# EAGLE board UVBoxSchematic_r (EAGLE 7.5.0)
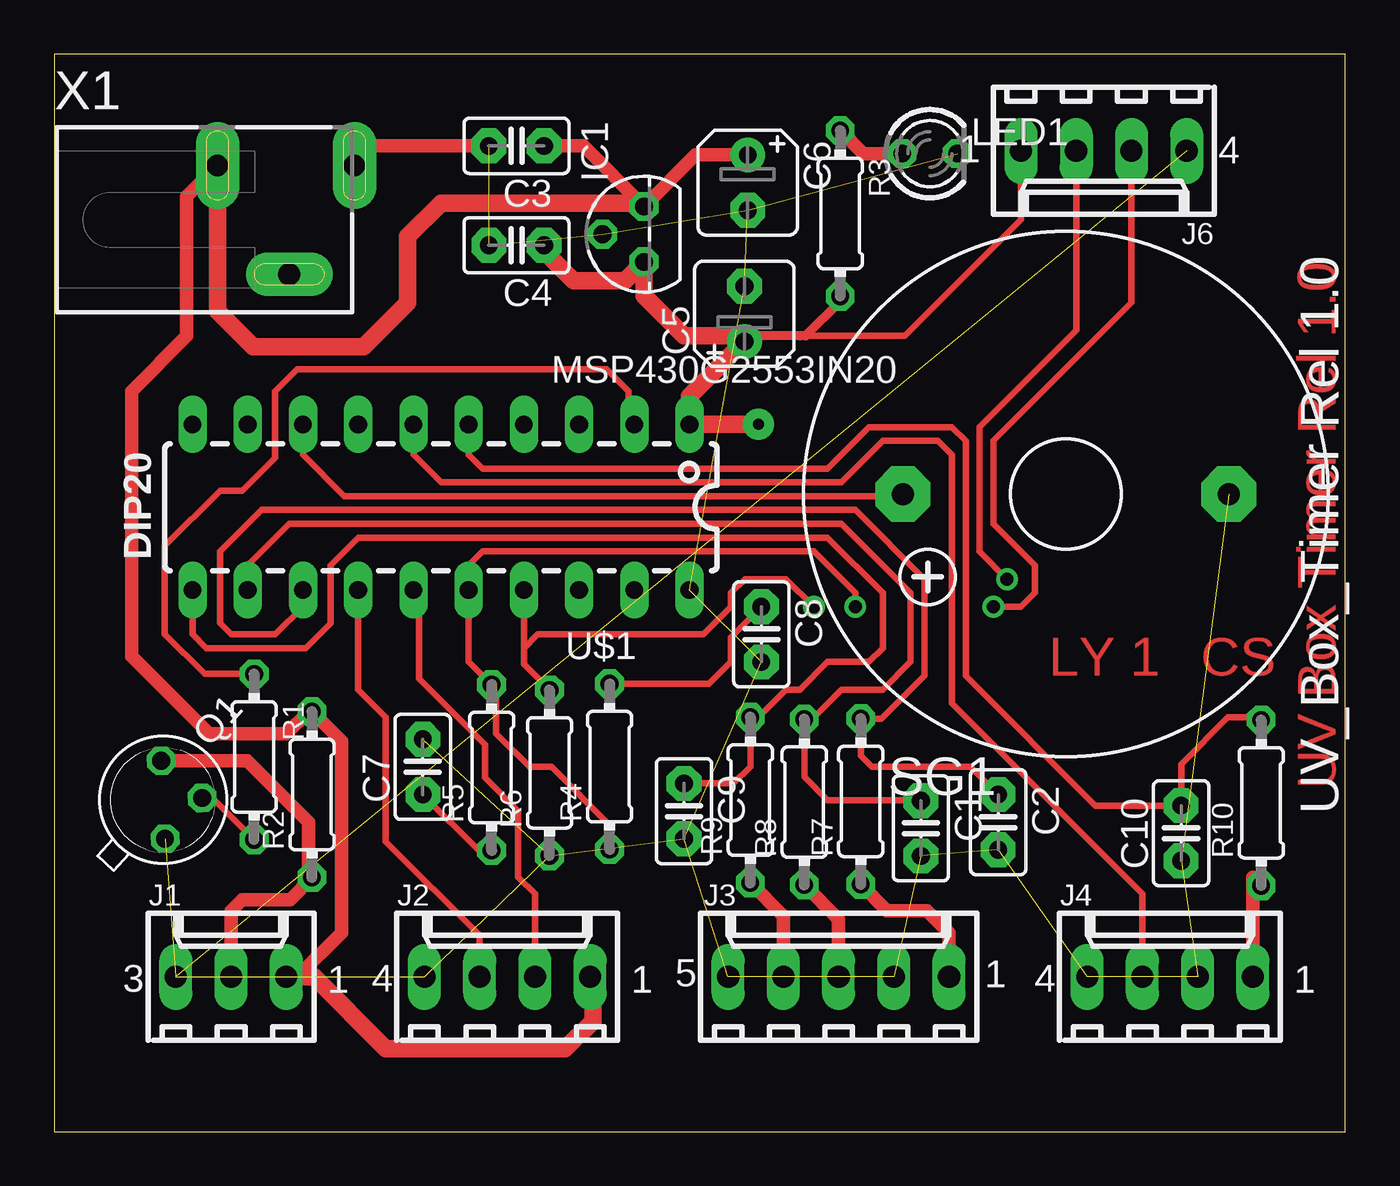
[diagram p0: board, top side]
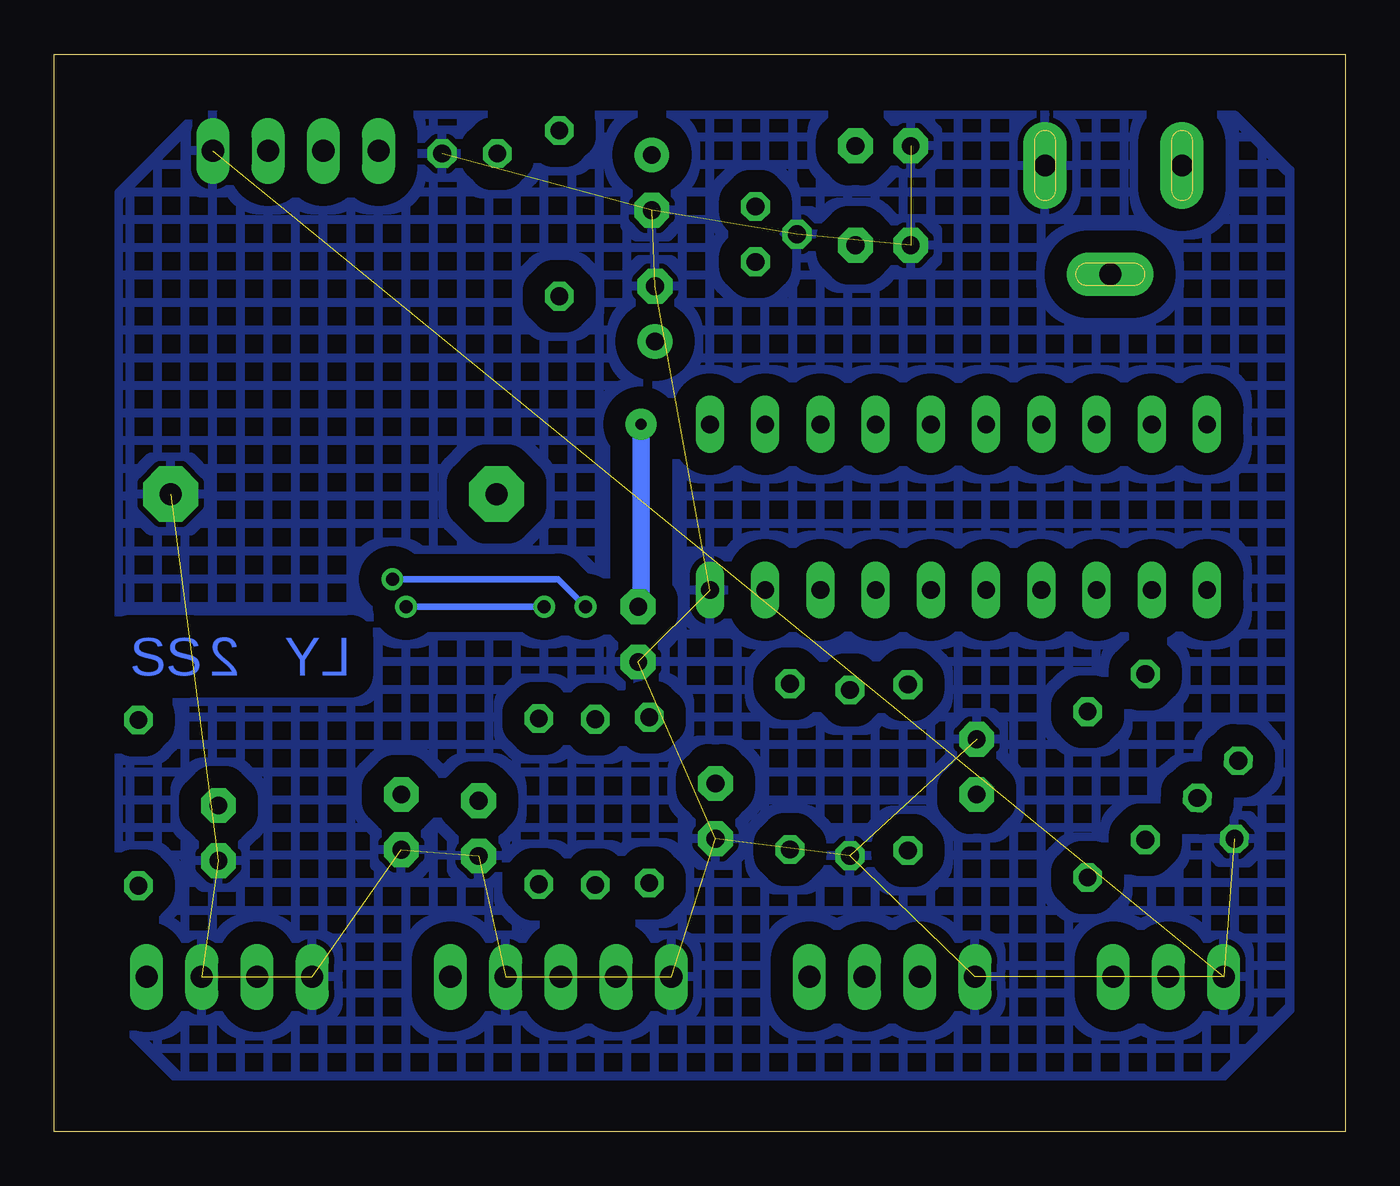
[diagram p1: board, bottom side, seen from below]

Size 59.36 x 49.52 mm. Coordinates in mm from the lower left corner, seen from the top.
Outline: 0,0 59.36,0 59.36,49.52 0,49.52 0,0
Copper layers (1*16): Top 0.035mm / dielectric 2mm / Bottom 0.035mm
Design rules "default *": minimum track width 10mil, minimum drill 0.3mm, track to track 12mil, track to pad 12mil, pad to pad 12mil, via to via 12mil, smd to smd 8mil, copper to edge 40mil, drill to drill 8mil, minimum pad ring 10mil, minimum via ring 8mil, stop-mask expansion 4mil, vias tented up to drill 0mil, thermal gap 10mil
Net classes: 0 default: width 0.305 mm, drill 0.5 mm, clearance 0.305 mm

## Footprints (pad centres in the part's own frame; a part is rotated, then mirrored left to right if it is on the bottom)
C2.5-2 = drill 0.813 pad 1.6 octagon: 1 -1.27,0; 2 1.27,0
B45181A = drill 0.813 pad 1.6: + -1.27,0 | drill 0.813 pad 1.6 octagon: - 1.27,0
TO92 = drill 0.813 octagon: 1 -1.27,0; 2 0,1.905; 3 1.27,0
6410-03 = drill 1.016 long: 1 2.54,0; 2 0,0; 3 -2.54,0
6410-04 = drill 1.016 long: 1 3.81,0; 2 1.27,0; 3 -1.27,0; 4 -3.81,0
6410-05 = drill 1.016 long: 1 5.08,0; 2 2.54,0; 3 0,0; 4 -2.54,0; 5 -5.08,0
LED3MM = drill 0.813 octagon: A -1.27,0; K 1.27,0
TO18 = drill 0.813 octagon: 1 -1.27,-1.27; 2 1.27,-1.27; 3 1.27,1.27
0204/7 = drill 0.813 octagon: 1 -3.81,0; 2 3.81,0
F/CM04P = drill 1.016 pad 2.54 octagon: + 7.493,0; - -7.493,0
DIP20 = drill 0.813 pad 1.27 long: 1 -11.43,-3.81 | drill 0.813 long: 2 -8.89,-3.81; 3 -6.35,-3.81; 4 -3.81,-3.81; 5 -1.27,-3.81; 6 1.27,-3.81; 7 3.81,-3.81; 8 6.35,-3.81; 9 8.89,-3.81; 10 11.43,-3.81; 11 11.43,3.81; 12 8.89,3.81; 13 6.35,3.81; 14 3.81,3.81; 15 1.27,3.81; 16 -1.27,3.81; 17 -3.81,3.81; 18 -6.35,3.81; 19 -8.89,3.81; 20 -11.43,3.81
SCD-014-A = drill 1 pad 2 long: 1 -2.5,13.8; 2 -2.5,7.5; 3 2.5,10.8

## Placement (x,y rotation side)
C1  .001uF  [C2.5-2]  39.85,13.94 270 top
C2  0.001uF  [C2.5-2]  43.4,14.22 270 top
C3  .33uF  [C2.5-2]  21.25,45.31 180 top
C4  .1uF  [C2.5-2]  21.25,40.74 180 top
C5  47uF  [B45181A]  31.73,37.59 90 top
C6  10uF  [B45181A]  31.88,43.63 270 top
C7  0.01uF  [C2.5-2]  16.94,16.76 90 top
C8  .1uF  [C2.5-2]  32.51,22.86 270 top
C9  .001uF  [C2.5-2]  28.96,14.73 270 top
C10  .001uF  [C2.5-2]  51.82,13.72 90 top
IC1  78L33  [TO92]  27.12,41.25 90 top
J1  22-27-2031-03  [6410-03]  8.13,7.11 0 top
J2  22-27-2041-04  [6410-04]  20.83,7.11 0 top
J3  22-27-2051-05  [6410-05]  36.07,7.11 0 top
J4  22-27-2041-04  [6410-04]  51.31,7.11 0 top
J6  22-27-2041-04  [6410-04]  48.26,45.08 180 top
LED1  Red  [LED3MM]  40.26,44.96 0 top
Q1  2N4140  [TO18]  5,15.25 47.8 top
R1  1k  [0204/7]  9.19,17.23 270 top
R2  10k  [0204/7]  11.85,15.49 90 top
R3  470  [0204/7]  36.14,42.21 270 top
R4  47k  [0204/7]  25.53,16.78 90 top
R5  1k  [0204/7]  20.11,16.74 90 top
R6  10k  [0204/7]  22.77,16.49 90 top
R7  47  [0204/7]  37.09,15.18 90 top
R8  47  [0204/7]  34.49,15.15 90 top
R9  47  [0204/7]  32,15.24 90 top
R10  47  [0204/7]  55.5,15.11 90 top
SG1  Buzzer  [F/CM04P]  46.51,29.31 180 top
U$1  MSP430G2553IN20  [DIP20]  17.78,28.7 180 top
X1  A  [SCD-014-A]  0,41.91 270 top

## Library data of the parts
C1 C9 C10 = capacitor-wima; A: 10
C2-C4 C7 C8 = capacitor-wima
C5 C6 R1-R10 = resistor
IC1 = linear
J1-J4 J6 = con-molex; OC_FARNELL: unknown; OC_NEWARK: unknown
LED1 = led
Q1 = transistor-npn
SG1 = buzzer; OC_FARNELL: unknown; OC_NEWARK: unknown
U$1 = GuShH
X1 = con-shiua-chyuan; OC_FARNELL: unknown; OC_NEWARK: unknown

## Nets
+3V3: C4.1 C5.+ C8.1 IC1.1 J6.1 R3.2 R4.2 U$1.1
GND: C1.2 C2.2 C3.2 C4.2 C5.- C6.- C7.2 C8.2 C9.2 C10.1 IC1.2 J1.3 J2.4 J3.2 J3.5 J4.2 J4.4 J6.4 LED1.K Q1.1 R6.1 SG1.- U$1.20 X1.1
N$1: C3.1 C6.+ IC1.3 J1.1 J2.1 R2.2 X1.2
N$2: C2.1 R7.2 U$1.13
N$3: C1.1 R8.2 U$1.12
N$5: J2.3 U$1.14
N$6: J2.2 U$1.15
N$7: LED1.A R3.1
N$9: C10.2 R10.2 U$1.5
N$10: C7.1 R5.1
N$11: J1.2 Q1.3 R2.1
N$12: Q1.2 R1.2
N$13: R1.1 U$1.2
N$14: J4.3 U$1.6
N$15: SG1.+ U$1.8
N$16: J6.2 R6.2 U$1.17
N$17: J3.3 R8.1
N$18: J4.1 R10.1
N$19: J6.3 R4.1 R5.2 U$1.16
N$20: J3.1 R7.1
N$22: C9.1 R9.2 U$1.11
N$23: J3.4 R9.1

## Tracks (layer width: path | path; a pad name or v marks a point on that pad's centre or on a via)
+3V3  (via drill 0.5 pad 1.42)
  Top 0.305: R4.2 30.11,20.59 31.11,21.59 31.11,22.73 C8.1 | J6.1 44.45,41.91 39.12,36.58 34.29,36.58
  Top 0.406: R3.2 36.14,38.17 34.54,36.58 34.29,36.58 31.99,36.58 C5.+
  Top 0.813: C4.1 22.52,40.48 23.88,39.12 26.25,39.12 IC1.1 27.12,38.41 28.96,36.58 31.48,36.58 C5.+ 29.21,33.8 U$1.1 v32.38,32.51
  Bottom 0.813: v32.38,32.51 32.38,24.26 C8.1
GND  (22 unrouted)
  Top 0.61: C3.2 14.7,45.31 X1.1
  pour Bottom (isolate 1.016, hatched): 2.54,5.59 5.59,2.54 53.85,2.54 56.39,5.08 56.39,43.18 52.83,46.74 5.08,46.74 2.54,44.2
N$1
  Top 0.61: C3.1 24.33,45.31 IC1.3 29.49,44.9 C6.+ | J1.1 11.18,7.11 13.21,9.14 13.21,17.94 R2.2 11.68,19.3 10.67,18.29 7.11,18.29 3.56,21.84 3.56,34.04 6.1,36.58 6.1,43.01 X1.2
  Top 0.813: X1.2 7.5,37.71 9.14,36.07 14.22,36.07 16.26,38.1 16.26,41.15 17.78,42.67 26.97,42.67 IC1.3 | J2.1 24.77,6.98 24.77,5.08 23.5,3.81 15.24,3.81 11.94,7.11 J1.1
N$2
  Top 0.305: C2.1 42.13,16.76 37.59,16.76 37.09,17.27 R7.2 38.04,18.99 40.01,20.95 40.01,25.4 36.83,28.57 9.53,28.57 7.62,26.67 7.62,23.37 8.13,22.86 10.16,22.86 11.43,24.13 U$1.13
N$3
  Top 0.305: C1.1 39.82,15.24 35.56,15.24 34.49,16.31 R8.2 34.83,18.96 36.2,20.32 38.1,20.32 39.37,21.59 39.37,24.76 36.2,27.94 10.79,27.94 8.89,26.04 U$1.12
N$5
  Top 0.305: U$1.14 13.97,20.32 15.24,19.05 15.24,13.34 19.56,9.02 J2.3
N$6
  Top 0.305: J2.2 22.1,10.92 21.34,11.68 21.34,14.73 19.81,16.26 19.81,17.78 16.76,20.83 16.76,24.64 U$1.15
N$7
  Top 0.61: LED1.A 37.2,44.96 R3.1
N$9
  Top 0.305: 51.82,14.86 C10.2 | U$1.5 19.05,31.11 19.68,30.48 35.56,30.48 37.47,32.39 41.27,32.39 41.91,31.75 41.91,20.95 47.88,14.99 C10.2 | R10.2 55.37,19.05 53.98,19.05 51.82,16.89 C10.2
N$10
  Top 0.305: R5.1 19.51,12.93 C7.1
N$11
  Top 0.61: Q1.3 8.86,17.05 11.68,14.22 11.68,11.85 R2.1 10.83,10.67 8.64,10.67 8.13,10.16 J1.2
N$12
  Top 0.305: Q1.2 7.26,15.34 R1.2
N$13
  Top 0.305: R1.1 6.9,21.04 5.08,22.86 5.08,26.92 7.62,29.46 8.64,29.46 10.16,30.99 10.16,34.04 11.18,35.05 25.4,35.05 26.42,34.04 26.42,32.77 U$1.2
N$14
  Top 0.305: J4.3 50.04,10.92 41.27,19.68 41.27,31.11 40.64,31.75 38.1,31.75 36.2,29.85 17.78,29.85 16.51,31.11 U$1.6
N$15
  Top 0.305: U$1.8 11.43,31.11 13.34,29.21 39.02,29.21 SG1.+
N$16  (via drill 0.6)
  Top 0.305: U$1.17 21.59,22.22 | 21.59,22.22 21.59,21.48 R6.2 | J6.2 46.99,36.83 42.55,32.39 42.55,26.67 v43.81,25.4 | v34.92,24.13 33.66,25.4 31.75,25.4 31.11,24.76 31.11,24.13 29.84,22.86 22.23,22.86 21.59,22.22
  Bottom 0.305: v43.81,25.4 36.2,25.4 v34.92,24.13
N$17
  Top 0.61: J3.3 36.07,9.76 R8.1
N$18
  Top 0.61: J4.1 55.12,11.68 R10.1
N$19  (via drill 0.6)
  Top 0.305: R4.1 25.53,14.09 22.86,16.76 21.84,16.76 20.32,18.29 20.32,20.33 R5.2 19.05,21.6 U$1.16 19.05,26.04 19.68,26.67 34.92,26.67 36.83,24.76 v36.83,24.13 | J6.3 49.53,38.1 43.18,31.75 43.18,27.94 45.09,26.04 45.09,24.76 44.45,24.13 v43.18,24.13
  Bottom 0.305: v36.83,24.13 v43.18,24.13
N$20
  Top 0.61: J3.1 41.15,9.14 40.13,10.16 38.29,10.16 R7.1
N$22
  Top 0.305: C9.1 31.24,16 32,16.76 R9.2 32.38,19.05 33.66,20.32 34.29,20.32 35.56,21.59 37.47,21.59 38.1,22.22 38.1,24.76 35.56,27.31 13.97,27.31 12.7,26.04 12.7,23.37 11.56,22.22 6.99,22.22 6.35,22.86 U$1.11
N$23
  Top 0.61: J3.4 33.53,9.91 R9.1

## Text on the board
Top: UV Box Timer Rel 1.0 | LY 1 | CS
Bottom: LY 2 | SS
_tsilk: UV_Box_Timer Rel 1.0